# EAGLE board stage_light_paste (EAGLE 6.6.0)
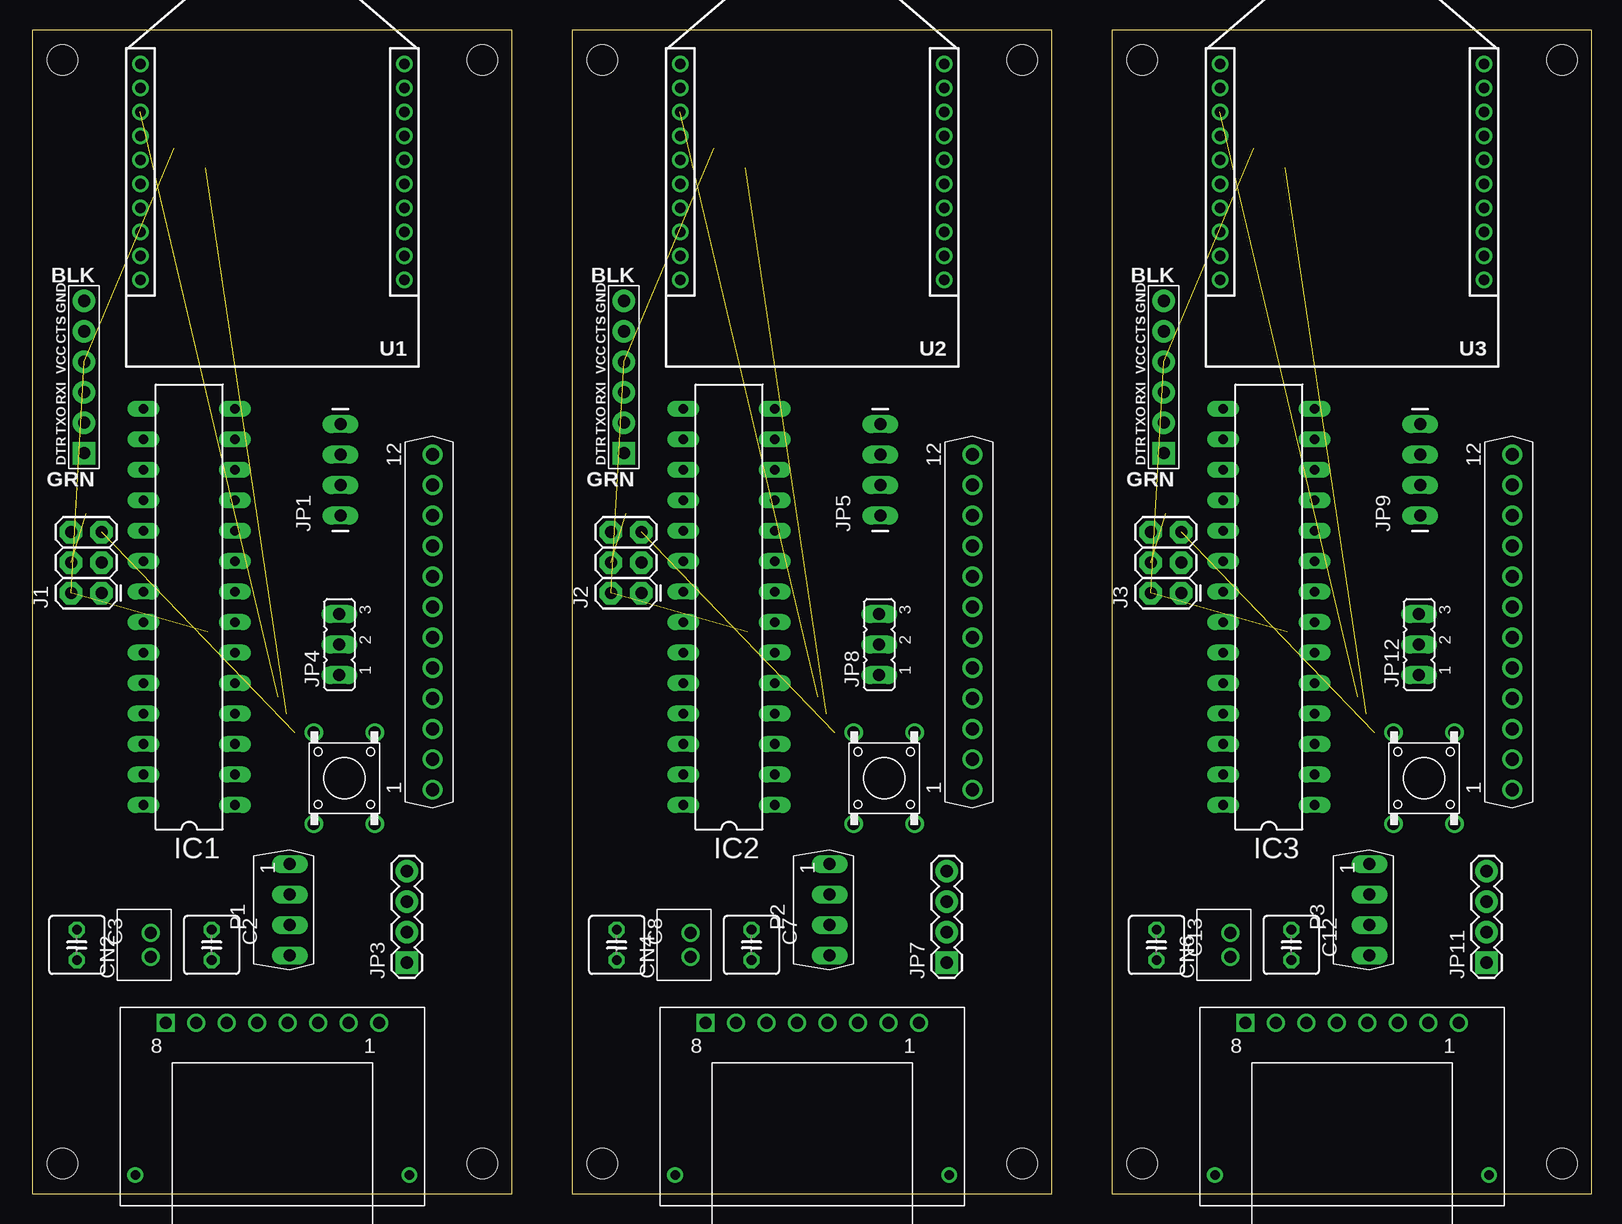
[diagram p0: board, top side]
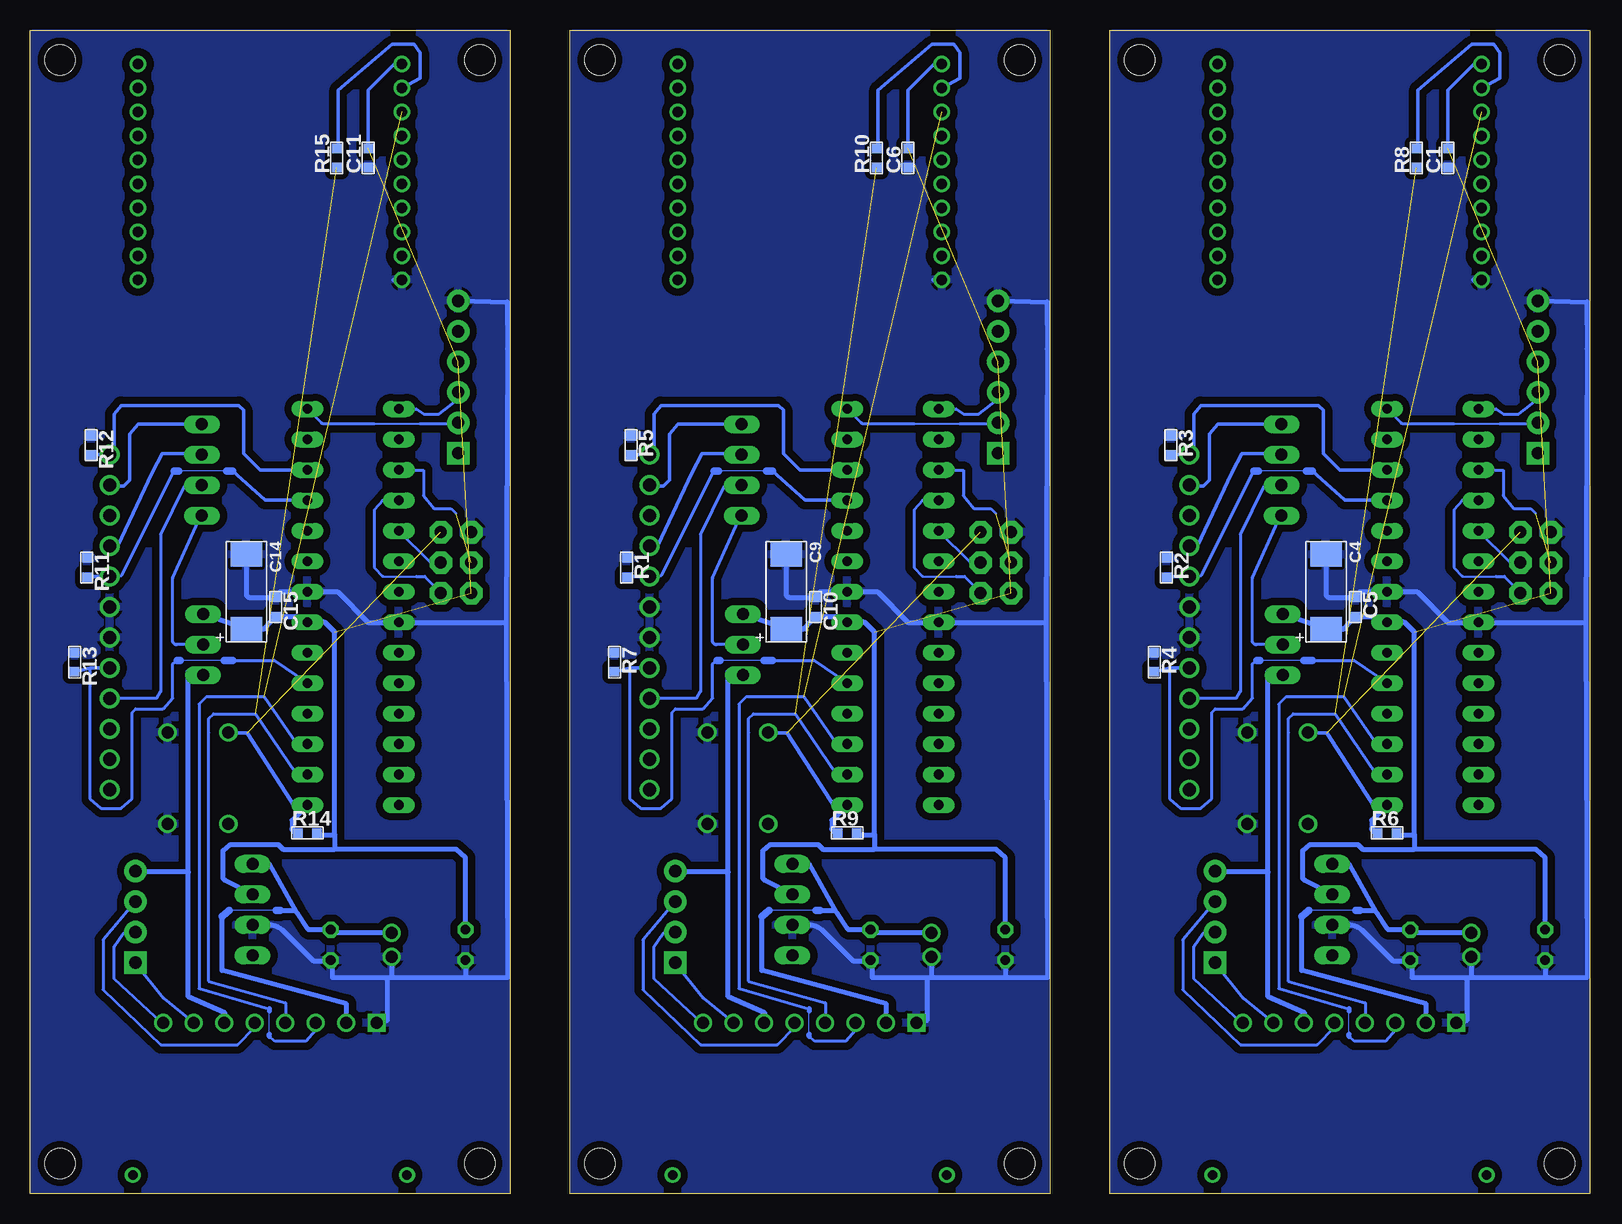
[diagram p1: board, bottom side, seen from below]

Size 130 x 97 mm. Coordinates in mm from the lower left corner, seen from the top.
Outline: 40,0 40,97 0,97 0,0 40,0
Outline: 85,0 85,97 45,97 45,0 85,0
Outline: 130,0 130,97 90,97 90,0 130,0
Copper layers (1*16): Top 0.035mm / dielectric 1.5mm / Bottom 0.035mm
Design rules "default *": minimum track width 10mil, minimum drill 24mil, track to track 8mil, track to pad 8mil, pad to pad 8mil, via to via 8mil, smd to smd 8mil, copper to edge 0mil, drill to drill 8mil, minimum pad ring 10mil, minimum via ring 8mil, stop-mask expansion 4mil, vias tented up to drill 0mil, thermal gap 10mil
Holes 2.5 mm at 37.5,94.5 2.5,94.5 2.5,2.5 37.5,2.5 82.5,94.5 47.5,94.5 47.5,2.5 82.5,2.5 127.5,94.5 92.5,94.5 92.5,2.5 127.5,2.5

## Footprints (pad centres in the part's own frame; a part is rotated, then mirrored left to right if it is on the bottom)
1608(1.6*0.8MM) = smd 0.8 x 0.8: P$1 0.8,0; P$2 -0.8,0
C025-050X050 = drill 0.813 octagon: 1 -1.27,0; 2 1.27,0
6134(6.1*3.4MM)_POLAR = smd 2 x 2.6: + 3.1,0; - -3.1,0
AE-RJ-45-LAN-DIP-A = drill 1 square: 1 -8.89,8.89 | drill 1: 2 -6.35,8.89; 3 -3.81,8.89; 4 -1.27,8.89; 5 1.27,8.89; 6 3.81,8.89; 7 6.35,8.89; 8 8.89,8.89 | drill 0.8: P$11 -11.43,-3.81; P$12 11.43,-3.81
B2B-PH-K-S(2MM_PITCH) = drill 1: 1 1,0; 2 -1,0
DIL28-3 = drill 0.813 long: 1 -16.51,-3.81; 2 -13.97,-3.81; 3 -11.43,-3.81; 4 -8.89,-3.81; 5 -6.35,-3.81; 6 -3.81,-3.81; 7 -1.27,-3.81; 8 1.27,-3.81; 9 3.81,-3.81; 10 6.35,-3.81; 11 8.89,-3.81; 12 11.43,-3.81; 13 13.97,-3.81; 14 16.51,-3.81; 15 16.51,3.81; 16 13.97,3.81; 17 11.43,3.81; 18 8.89,3.81; 19 6.35,3.81; 20 3.81,3.81; 21 1.27,3.81; 22 -1.27,3.81; 23 -3.81,3.81; 24 -6.35,3.81; 25 -8.89,3.81; 26 -11.43,3.81; 27 -13.97,3.81; 28 -16.51,3.81
2X3 = drill 1.016 pad 1.88 octagon: 1 0,0; 2 0,2.54; 3 2.54,0; 4 2.54,2.54; 5 5.08,0; 6 5.08,2.54
1X04_LONGPADS = drill 1 pad 1 long: 1 0,0; 2 2.54,0; 3 5.08,0; 4 7.62,0
FTDI_DEVICE_SIDE = drill 1.016 pad 1.88 square: P$1 -6.35,0 | drill 1.016 pad 1.88: P$2 -3.81,0; P$3 -1.27,0; P$4 1.27,0; P$5 3.81,0; P$6 6.35,0
1X04 = drill 1.016 pad 1.88 square: 1 0,0 | drill 1.016 pad 1.88: 2 2.54,0; 3 5.08,0; 4 7.62,0
JP2 = drill 1 pad 1 long: 1 -2.54,0; 2 0,0; 3 2.54,0
PQ3RD23 = drill 1 pad 1.2 long: 1 -3.81,0; 2 -1.27,0; 3 1.27,0; 4 3.81,0
MP4401 = drill 1.1: 1 -13.97,0; 2 -11.43,0; 3 -8.89,0; 4 -6.35,0; 5 -3.81,0; 6 -1.27,0; 7 1.27,0; 8 3.81,0; 9 6.35,0; 10 8.89,0; 11 11.43,0; 12 13.97,0
1608(1.6*0.8MM)' = smd 0.8 x 0.8: P$3 -0.8,0; P$4 0.8,0
PUSH_SW = drill 1: 1 -3.81,2.54; 2 3.81,2.54; 3 3.81,-2.54; 4 -3.81,-2.54
XBEE_ON_XPPN101BFCN-RC = drill 0.9: 1 -11,18; 2 -11,16; 3 -11,14; 4 -11,12; 5 -11,10; 6 -11,8; 7 -11,6; 8 -11,4; 9 -11,2; 10 -11,0; 11 11,0; 12 11,2; 13 11,4; 14 11,6; 15 11,8; 16 11,10; 17 11,12; 18 11,14; 19 11,16; 20 11,18

## Placement (x,y rotation side)
C1  [1608(1.6*0.8MM)]  11.8,86.33 90 bottom
C2  50u  [C025-050X050]  14.93,20.72 270 top
C3  50u  [C025-050X050]  3.7,20.72 270 top
C4  [6134(6.1*3.4MM)_POLAR]  21.96,50.17 270 bottom
C5  [1608(1.6*0.8MM)]  19.52,48.9 270 bottom
C6  [1608(1.6*0.8MM)]  56.8,86.33 90 bottom
C7  50u  [C025-050X050]  59.93,20.72 270 top
C8  50u  [C025-050X050]  48.7,20.72 270 top
C9  [6134(6.1*3.4MM)_POLAR]  66.96,50.17 270 bottom
C10  [1608(1.6*0.8MM)]  64.52,48.9 270 bottom
C11  [1608(1.6*0.8MM)]  101.8,86.33 90 bottom
C12  50u  [C025-050X050]  104.93,20.72 270 top
C13  50u  [C025-050X050]  93.7,20.72 270 top
C14  [6134(6.1*3.4MM)_POLAR]  111.96,50.17 270 bottom
C15  [1608(1.6*0.8MM)]  109.52,48.9 270 bottom
CN1  RJ45-8DIP  [AE-RJ-45-LAN-DIP-A]  20,5.35 0 top
CN2  2POLE-PH_TOP  [B2B-PH-K-S(2MM_PITCH)]  9.85,20.72 90 top
CN3  RJ45-8DIP  [AE-RJ-45-LAN-DIP-A]  65,5.35 0 top
CN4  2POLE-PH_TOP  [B2B-PH-K-S(2MM_PITCH)]  54.85,20.72 90 top
CN5  RJ45-8DIP  [AE-RJ-45-LAN-DIP-A]  110,5.35 0 top
CN6  2POLE-PH_TOP  [B2B-PH-K-S(2MM_PITCH)]  99.85,20.72 90 top
IC1  MEGA8-P  [DIL28-3]  13.07,48.9 90 top
IC2  MEGA8-P  [DIL28-3]  58.07,48.9 90 top
IC3  MEGA8-P  [DIL28-3]  103.07,48.9 90 top
J1  AVR_SPI_PRG_6PTH  [2X3]  5.76,50.06 90 top
J2  AVR_SPI_PRG_6PTH  [2X3]  50.76,50.06 90 top
J3  AVR_SPI_PRG_6PTH  [2X3]  95.76,50.06 90 top
JP1  [1X04_LONGPADS]  25.67,56.52 90 top
JP2  FTDI_DEVICE  [FTDI_DEVICE_SIDE]  4.31,68.07 90 top
JP3  [1X04]  31.21,19.25 90 top
JP4  [JP2]  25.57,45.76 90 top
JP5  [1X04_LONGPADS]  70.67,56.52 90 top
JP6  FTDI_DEVICE  [FTDI_DEVICE_SIDE]  49.31,68.07 90 top
JP7  [1X04]  76.21,19.25 90 top
JP8  [JP2]  70.57,45.76 90 top
JP9  [1X04_LONGPADS]  115.67,56.52 90 top
JP10  FTDI_DEVICE  [FTDI_DEVICE_SIDE]  94.31,68.07 90 top
JP11  [1X04]  121.21,19.25 90 top
JP12  [JP2]  115.57,45.76 90 top
P1  PQ3RD23  [PQ3RD23]  21.45,23.66 270 top
P2  PQ3RD23  [PQ3RD23]  66.45,23.66 270 top
P3  PQ3RD23  [PQ3RD23]  111.45,23.66 270 top
Q1  MP4401  [MP4401]  33.35,47.63 90 top
Q2  MP4401  [MP4401]  78.35,47.63 90 top
Q3  MP4401  [MP4401]  123.35,47.63 90 top
R1  10k  [1608(1.6*0.8MM)']  80.26,52.19 270 bottom
R2  10k  [1608(1.6*0.8MM)']  35.26,52.19 270 bottom
R3  10k  [1608(1.6*0.8MM)']  34.9,62.39 270 bottom
R4  10k  [1608(1.6*0.8MM)']  36.28,44.29 270 bottom
R5  10k  [1608(1.6*0.8MM)']  79.9,62.39 270 bottom
R6  [1608(1.6*0.8MM)']  16.88,30.05 0 bottom
R7  10k  [1608(1.6*0.8MM)']  81.28,44.29 270 bottom
R8  10k  [1608(1.6*0.8MM)']  14.42,86.34 90 bottom
R9  [1608(1.6*0.8MM)']  61.88,30.05 0 bottom
R10  10k  [1608(1.6*0.8MM)']  59.42,86.34 90 bottom
R11  10k  [1608(1.6*0.8MM)']  125.26,52.19 270 bottom
R12  10k  [1608(1.6*0.8MM)']  124.9,62.39 270 bottom
R13  10k  [1608(1.6*0.8MM)']  126.28,44.29 270 bottom
R14  [1608(1.6*0.8MM)']  106.88,30.05 0 bottom
R15  10k  [1608(1.6*0.8MM)']  104.42,86.34 90 bottom
SW1  PUSH_SWNORMAL  [PUSH_SW]  26,34.63 270 top
SW2  PUSH_SWNORMAL  [PUSH_SW]  71,34.63 270 top
SW3  PUSH_SWNORMAL  [PUSH_SW]  116,34.63 270 top
U1  XBEE_PROXPPN101BFCN  [XBEE_ON_XPPN101BFCN-RC]  20,76.17 0 top
U2  XBEE_PROXPPN101BFCN  [XBEE_ON_XPPN101BFCN-RC]  65,76.17 0 top
U3  XBEE_PROXPPN101BFCN  [XBEE_ON_XPPN101BFCN-RC]  110,76.17 0 top

## Library data of the parts
C1 C4-C6 C9-C11 C14 C15 = Capasitor
C2 C3 C7 C8 C12 C13 = rcl
CN1 CN3 CN5 = Connector-etc
CN2 CN4 CN6 = Connector-Housing
IC1-IC3 = atmel; OC_FARNELL: unknown; OC_NEWARK: unknown
J1-J3 JP1-JP3 JP5-JP7 JP9-JP11 = SparkFun-Connectors
JP4 JP8 JP12 = Jumper
P1-P3 = Voltage Regulator
Q1-Q3 = FET n-ch
R1-R15 = Resistor
SW1-SW3 = Switch
U1-U3 = ZigBee Modules

## Nets
AVCC: IC1.20
AVCC1: IC2.20
AVCC2: IC3.20
GND: C1.P$2 C2.2 C3.2 C4.- C5.P$2 CN1.1 CN2.2 IC1.8 IC1.22 J1.6 JP2.P$6 P1.3 Q1.6 Q1.7 R2.P$3 R3.P$3 R4.P$3 SW1.1 SW1.2 U1.10
GND1: C6.P$2 C7.2 C8.2 C9.- C10.P$2 CN3.1 CN4.2 IC2.8 IC2.22 J2.6 JP6.P$6 P2.3 Q2.6 Q2.7 R1.P$3 R5.P$3 R7.P$3 SW2.1 SW2.2 U2.10
GND2: C11.P$2 C12.2 C13.2 C14.- C15.P$2 CN5.1 CN6.2 IC3.8 IC3.22 J3.6 JP10.P$6 P3.3 Q3.6 Q3.7 R11.P$3 R12.P$3 R13.P$3 SW3.1 SW3.2 U3.10
N$1: JP1.3 Q1.9
N$2: JP1.2 Q1.4
N$3: IC1.12 Q1.12 R3.P$4
N$4: IC1.11 Q1.8 R2.P$4
N$5: IC1.5 Q1.5 R4.P$4
N$6: JP1.4 Q1.11
N$7: IC1.14 JP2.P$2
N$8: IC1.15 JP2.P$3
N$9: CN1.8 JP3.2
N$10: CN1.5 JP3.3
N$11: CN1.7 JP3.1
N$12: IC1.1 J1.5 R6.P$3 SW1.4
N$13: R8.P$4 U1.2
N$14: IC2.12 Q2.12 R5.P$4
N$15: CN1.4 IC1.2 R8.P$3
N$16: CN1.3 IC1.3 U1.3
N$17: IC2.11 Q2.8 R1.P$4
N$18: IC1.18 J1.1
N$19: IC1.19 J1.3
N$20: IC1.17 J1.4
N$21: IC2.5 Q2.5 R7.P$4
N$22: IC2.1 J2.5 R9.P$3 SW2.4
N$23: CN3.4 IC2.2 R10.P$3
N$24: CN3.3 IC2.3 U2.3
N$25: IC2.18 J2.1
N$26: IC2.19 J2.3
N$27: IC2.17 J2.4
N$28: JP5.3 Q2.9
N$29: JP5.2 Q2.4
N$30: JP5.4 Q2.11
N$31: IC2.14 JP6.P$2
N$32: IC2.15 JP6.P$3
N$33: CN3.8 JP7.2
N$34: CN3.5 JP7.3
N$35: CN3.7 JP7.1
N$36: R10.P$4 U2.2
N$37: IC3.12 Q3.12 R12.P$4
N$38: IC3.11 Q3.8 R11.P$4
N$39: IC3.5 Q3.5 R13.P$4
N$40: IC3.1 J3.5 R14.P$3 SW3.4
N$41: CN5.4 IC3.2 R15.P$3
N$42: CN5.3 IC3.3 U3.3
N$43: IC3.18 J3.1
N$44: IC3.19 J3.3
N$45: IC3.17 J3.4
N$46: JP9.3 Q3.9
N$47: JP9.2 Q3.4
N$48: JP9.4 Q3.11
N$49: IC3.14 JP10.P$2
N$50: IC3.15 JP10.P$3
N$51: CN5.8 JP11.2
N$52: CN5.5 JP11.3
N$53: CN5.7 JP11.1
N$54: R15.P$4 U3.2
VCC1: C2.1 CN1.2 CN2.1 P1.1
VCC2: C1.P$1 C3.1 C4.+ C5.P$1 IC1.7 J1.2 JP2.P$4 JP4.3 P1.2 R6.P$4 U1.1
VCC3: JP1.1 JP4.2
VCC4: CN1.6 JP3.4 JP4.1
VCC5: C6.P$1 C8.1 C9.+ C10.P$1 IC2.7 J2.2 JP6.P$4 JP8.3 P2.2 R9.P$4 U2.1
VCC6: C7.1 CN3.2 CN4.1 P2.1
VCC7: JP5.1 JP8.2
VCC8: CN3.6 JP7.4 JP8.1
VCC9: C11.P$1 C13.1 C14.+ C15.P$1 IC3.7 J3.2 JP10.P$4 JP12.3 P3.2 R14.P$4 U3.1
VCC10: C12.1 CN5.2 CN6.1 P3.1
VCC11: JP9.1 JP12.2
VCC12: CN5.6 JP11.4 JP12.1

## Tracks (layer width: path | path; a pad name or v marks a point on that pad's centre or on a via)
GND
  Bottom 0.2: C5.P$2 19.42,49.92 arc90 19.17,50.17 | IC1.22 arc45 9.09,47.7 8.7,47.7
  Bottom 0.406: C3.2 3.7,18 | P1.3 20.09,22.41 arc45 18.92,21.92 16.4,19.4 15.05,19.4 | 15.05,19.4 arc-45 C2.2 | U1.10 9.66,76.17 | 0.3,47.6 0.2,70.4 0.22,74.32 JP2.P$6 | 0.3,47.6 0.2,18 3.7,18 | C4.- 21.96,49.95 arc-90 21.71,49.7 C5.P$2 | 19.17,50.17 IC1.8 14.37,50.17 11.8,47.6 8.8,47.6 8.7,47.7 8.5,47.6 0.3,47.6 | 3.7,18 9.85,18 | 9.85,18 10.2,18 | 10.2,18 14.8,18 14.8,19.15 arc-90 15.05,19.4 | CN2.2 9.85,18 | CN1.1 10.2,14.44 10.2,18
  pour Bottom (isolate 0.6): 0.3,0.3 0.3,96.7 39.7,96.7 39.7,0.3
GND1
  Bottom 0.2: C10.P$2 64.42,49.92 arc90 64.17,50.17 | IC2.22 arc45 54.09,47.7 53.7,47.7
  Bottom 0.406: C8.2 48.7,18 | P2.3 65.09,22.41 arc45 63.92,21.92 61.4,19.4 60.05,19.4 | 60.05,19.4 arc-45 C7.2 | U2.10 54.66,76.17 | 45.3,47.6 45.2,70.4 45.22,74.32 JP6.P$6 | 45.3,47.6 45.2,18 48.7,18 | C9.- 66.96,49.95 arc-90 66.71,49.7 C10.P$2 | 64.17,50.17 IC2.8 59.37,50.17 56.8,47.6 53.8,47.6 53.7,47.7 53.5,47.6 45.3,47.6 | 48.7,18 54.85,18 | 54.85,18 55.2,18 | 55.2,18 59.8,18 59.8,19.15 arc-90 60.05,19.4 | CN4.2 54.85,18 | CN3.1 55.2,14.44 55.2,18
  pour Bottom (isolate 0.6): 45.3,0.3 45.3,96.7 84.7,96.7 84.7,0.3
GND2
  Bottom 0.2: C15.P$2 109.42,49.92 arc90 109.17,50.17 | IC3.22 arc45 99.09,47.7 98.7,47.7
  Bottom 0.406: C13.2 93.7,18 | P3.3 110.09,22.41 arc45 108.92,21.92 106.4,19.4 105.05,19.4 | 105.05,19.4 arc-45 C12.2 | U3.10 99.67,76.17 | 90.3,47.6 90.2,70.4 90.22,74.32 JP10.P$6 | 90.3,47.6 90.2,18 93.7,18 | C14.- 111.96,49.95 arc-90 111.71,49.7 C15.P$2 | 109.17,50.17 IC3.8 104.37,50.17 101.8,47.6 98.8,47.6 98.7,47.7 98.5,47.6 90.3,47.6 | 93.7,18 99.85,18 | 99.85,18 100.2,18 | 100.2,18 104.8,18 104.8,19.15 arc-90 105.05,19.4 | CN6.2 99.85,18 | CN5.1 100.2,14.44 100.2,18
  pour Bottom (isolate 0.6): 90.3,0.3 90.3,96.7 129.7,96.7 129.7,0.3
N$1
  Bottom 0.2: Q1.9 32.7,54 | 25.77,61.7 JP1.3
  Bottom 0.305: 32.7,54 29.8,60.1 29,61.7 25.77,61.7
N$2
  Bottom 0.2: 25.83,59 JP1.2
  Bottom 0.254: Q1.4 29.45,41.28 29.1,41.83 29.1,54.9 27.1,59 25.83,59
N$3
  Bottom 0.254: R3.P$4 35.1,61.6 | Q1.12 33,61.6
  Bottom 0.305: 33,61.6 33,65 32.4,65.7 22.6,65.7 22.2,65.3 22.2,61.7 20.83,60.33 IC1.12 | 35.1,61.6 Q1.12
N$4
  Bottom 0.1: IC1.11 | 23.6,60.25 27.6,60.25
  Bottom 0.254: Q1.8 32.36,51.54 28,60.25 | R2.P$4 34.86,51.44
  Bottom 0.305: 23.1,60.25 20.4,57.8 IC1.11 | 34.86,51.44 Q1.8
  Bottom 0.61: 28,60.25 27.6,60.25 | 23.6,60.25 23.1,60.25
N$5
  Bottom 0.1: 23.8,44.45 27.5,44.45
  Bottom 0.254: 27.75,44.45 28.1,44.15 28.1,41.3 28.9,40.4 31.2,40.4 31.5,40.1 31.5,32.9 32.4,32.1 34.05,32.1 35,32.9 35,43.81 | 23.1,44.45 19.63,44.45 IC1.5 | Q1.5 33.05,43.81
  Bottom 0.305: 33.05,43.81 35,43.81 R4.P$4
  Bottom 0.61: 27.75,44.45 27.5,44.45 | 23.8,44.45 23.1,44.45
N$6
  Bottom 0.2: 32.99,59 Q1.11
  Bottom 0.305: JP1.4 30.96,64.14 31.7,63.3 31.7,59.5 32.2,59 32.99,59
N$7
  Bottom 0.1: 4.87,64.15 JP2.P$2
  Bottom 0.15: 7.5,64.15 11.3,64.15
  Bottom 0.254: 4.87,64.15 7.5,64.15 | 11.3,64.15 15.46,64.15 arc45 15.74,64.27 IC1.14
N$8
  Bottom 0.127: 4.5,66.11 JP2.P$3
  Bottom 0.254: IC1.15 7.81,65.41 7.2,65 5.9,65 5,65.7 4.5,66.11
N$9
  Bottom 0.254: CN1.8 28.98,14.18 33,17.9 33,20.6 32.21,21.69 JP3.2
N$10
  Bottom 0.254: JP3.3 33.9,21.14 33.9,17 29.1,12.4 22.7,12.4 21.26,13.84 CN1.5
N$11
  Bottom 0.254: JP3.1 28.84,16.28 CN1.7
N$12  (1 unrouted)
  Bottom 0.2: 16.88,32.2 IC1.1
  Bottom 0.254: 17.9,32.2 16.88,32.2
  Bottom 0.305: SW1.4 23.4,38.4 21.9,38.4 17.9,32.2
  Bottom 0.406: IC1.1 18.15,31.12 18.15,30.43 arc-45 18.08,30.25 R6.P$3
N$13
  Bottom 0.3: R8.P$4 14.3,87.14 14.3,92 9.8,95.8 8,95.8 7.5,95.1 7.5,93 8.93,92.17 U1.2
N$14
  Bottom 0.254: R5.P$4 80.1,61.6 | Q2.12 78,61.6
  Bottom 0.305: 78,61.6 78,65 77.4,65.7 67.6,65.7 67.2,65.3 67.2,61.7 65.83,60.33 IC2.12 | 80.1,61.6 Q2.12
N$15  (1 unrouted)
  Bottom 0.2: 17.8,35 arc-45 17.62,34.93 IC1.2 | 18.7,14.93 CN1.4
  Bottom 0.254: 17.8,35 21.2,40 24.7,40 25.09,39.6 25.1,38.4 25.1,17.7 18.7,15.9 18.7,14.93
N$16  (1 unrouted)
  Bottom 0.1: 20.05,13.3 20.05,15.2
  Bottom 0.2: IC1.3 17.77,37.47
  Bottom 0.254: 17.77,37.47 20.5,41.4 25.3,41.4 25.9,40.8 25.9,17.1 20.05,15.4 | CN1.3 16.18,13.62 17,12.7 19.59,12.7 20.05,13.1
  Bottom 0.406: 20.05,15.4 20.05,15.2 | 20.05,13.1 20.05,13.3
N$17
  Bottom 0.1: IC2.11 | 68.6,60.25 72.6,60.25
  Bottom 0.254: Q2.8 77.36,51.54 73,60.25 | R1.P$4 79.86,51.44
  Bottom 0.305: 68.1,60.25 65.4,57.8 IC2.11 | 79.86,51.44 Q2.8
  Bottom 0.61: 73,60.25 72.6,60.25 | 68.6,60.25 68.1,60.25
N$18
  Bottom 0.15: 10.6,51.45 7.8,51.45
  Bottom 0.254: IC1.18 10.61,57.79 11.3,57 11.3,52.2 10.6,51.45 | 7.8,51.45 7.1,51.45 J1.1
N$19
  Bottom 0.1: 6.61,52.6 J1.3
  Bottom 0.254: 6.61,52.6 IC1.19
N$20  (1 unrouted)
  Bottom 0.254: IC1.17 9.26,60.3 7.2,60.3 7.2,58.2 6.3,57.1 4.9,57.1 4.5,56.7
N$21
  Bottom 0.1: 68.8,44.45 72.5,44.45
  Bottom 0.254: 72.75,44.45 73.1,44.15 73.1,41.3 73.9,40.4 76.2,40.4 76.5,40.1 76.5,32.9 77.4,32.1 79.05,32.1 80,32.9 80,43.81 | 68.1,44.45 64.63,44.45 IC2.5 | Q2.5 78.05,43.81
  Bottom 0.305: 78.05,43.81 80,43.81 R7.P$4
  Bottom 0.61: 72.75,44.45 72.5,44.45 | 68.8,44.45 68.1,44.45
N$22  (1 unrouted)
  Bottom 0.2: 61.88,32.2 IC2.1
  Bottom 0.254: 62.9,32.2 61.88,32.2
  Bottom 0.305: SW2.4 68.4,38.4 66.9,38.4 62.9,32.2
  Bottom 0.406: IC2.1 63.15,31.12 63.15,30.43 arc-45 63.08,30.25 R9.P$3
N$23  (1 unrouted)
  Bottom 0.2: 62.8,35 arc-45 62.62,34.93 IC2.2 | 63.7,14.93 CN3.4
  Bottom 0.254: 62.8,35 66.2,40 69.69,40 70.09,39.6 70.1,38.4 70.1,17.7 63.7,15.9 63.7,14.93
N$24  (1 unrouted)
  Bottom 0.1: 65.05,13.3 65.05,15.2
  Bottom 0.2: IC2.3 62.77,37.47
  Bottom 0.254: 62.77,37.47 65.5,41.4 70.3,41.4 70.9,40.8 70.9,17.1 65.05,15.4 | CN3.3 61.18,13.62 62,12.7 64.59,12.7 65.05,13.1
  Bottom 0.406: 65.05,15.4 65.05,15.2 | 65.05,13.1 65.05,13.3
N$25
  Bottom 0.15: 55.6,51.45 52.8,51.45
  Bottom 0.254: IC2.18 55.61,57.79 56.3,57 56.3,52.2 55.6,51.45 | 52.8,51.45 52.1,51.45 J2.1
N$26
  Bottom 0.1: 51.61,52.6 J2.3
  Bottom 0.254: 51.61,52.6 IC2.19
N$27  (1 unrouted)
  Bottom 0.254: IC2.17 54.26,60.3 52.2,60.3 52.2,58.2 51.3,57.1 49.9,57.1 49.5,56.7
N$28
  Bottom 0.2: Q2.9 77.7,54 | 70.77,61.7 JP5.3
  Bottom 0.305: 77.7,54 74.8,60.1 74,61.7 70.77,61.7
N$29
  Bottom 0.2: 70.83,59 JP5.2
  Bottom 0.254: Q2.4 74.45,41.28 74.1,41.83 74.1,54.9 72.1,59 70.83,59
N$30
  Bottom 0.2: 77.99,59 Q2.11
  Bottom 0.305: JP5.4 75.96,64.14 76.7,63.3 76.7,59.5 77.2,59 77.99,59
N$31
  Bottom 0.1: 49.87,64.15 JP6.P$2
  Bottom 0.15: 52.5,64.15 56.3,64.15
  Bottom 0.254: 49.87,64.15 52.5,64.15 | 56.3,64.15 60.47,64.15 arc45 60.74,64.27 IC2.14
N$32
  Bottom 0.127: 49.5,66.11 JP6.P$3
  Bottom 0.254: IC2.15 52.81,65.41 52.2,65 50.9,65 50,65.7 49.5,66.11
N$33
  Bottom 0.254: CN3.8 73.98,14.18 78,17.9 78,20.6 77.21,21.69 JP7.2
N$34
  Bottom 0.254: JP7.3 78.9,21.14 78.9,17 74.1,12.4 67.7,12.4 66.26,13.84 CN3.5
N$35
  Bottom 0.254: JP7.1 73.84,16.28 CN3.7
N$36
  Bottom 0.3: R10.P$4 59.3,87.14 59.3,92 54.8,95.8 53,95.8 52.5,95.1 52.5,93 53.93,92.17 U2.2
N$37
  Bottom 0.254: R12.P$4 125.1,61.6 | Q3.12 123,61.6
  Bottom 0.305: 123,61.6 123,65 122.4,65.7 112.6,65.7 112.2,65.3 112.2,61.7 110.83,60.33 IC3.12 | 125.1,61.6 Q3.12
N$38
  Bottom 0.1: IC3.11 | 113.6,60.25 117.6,60.25
  Bottom 0.254: Q3.8 122.36,51.54 118,60.25 | R11.P$4 124.86,51.44
  Bottom 0.305: 113.1,60.25 110.4,57.8 IC3.11 | 124.86,51.44 Q3.8
  Bottom 0.61: 118,60.25 117.6,60.25 | 113.6,60.25 113.1,60.25
N$39
  Bottom 0.1: 113.8,44.45 117.5,44.45
  Bottom 0.254: 117.75,44.45 118.1,44.15 118.1,41.3 118.9,40.4 121.2,40.4 121.5,40.1 121.5,32.9 122.4,32.1 124.05,32.1 125,32.9 125,43.81 | 113.1,44.45 109.63,44.45 IC3.5 | Q3.5 123.05,43.81
  Bottom 0.305: 123.05,43.81 125,43.81 R13.P$4
  Bottom 0.61: 117.75,44.45 117.5,44.45 | 113.8,44.45 113.1,44.45
N$40  (1 unrouted)
  Bottom 0.2: 106.88,32.2 IC3.1
  Bottom 0.254: 107.9,32.2 106.88,32.2
  Bottom 0.305: SW3.4 113.4,38.4 111.9,38.4 107.9,32.2
  Bottom 0.406: IC3.1 108.15,31.12 108.15,30.43 arc-45 108.08,30.25 R14.P$3
N$41  (1 unrouted)
  Bottom 0.2: 107.8,35 arc-45 107.62,34.93 IC3.2 | 108.7,14.93 CN5.4
  Bottom 0.254: 107.8,35 111.2,40 114.69,40 115.09,39.6 115.1,38.4 115.1,17.7 108.7,15.9 108.7,14.93
N$42  (1 unrouted)
  Bottom 0.1: 110.05,13.3 110.05,15.2
  Bottom 0.2: IC3.3 107.77,37.47
  Bottom 0.254: 107.77,37.47 110.5,41.4 115.3,41.4 115.9,40.8 115.9,17.1 110.05,15.4 | CN5.3 106.18,13.62 107,12.7 109.59,12.7 110.05,13.1
  Bottom 0.406: 110.05,15.4 110.05,15.2 | 110.05,13.1 110.05,13.3
N$43
  Bottom 0.15: 100.6,51.45 97.8,51.45
  Bottom 0.254: IC3.18 100.61,57.79 101.3,57 101.3,52.2 100.6,51.45 | 97.8,51.45 97.1,51.45 J3.1
N$44
  Bottom 0.1: 96.61,52.6 J3.3
  Bottom 0.254: 96.61,52.6 IC3.19
N$45  (1 unrouted)
  Bottom 0.254: IC3.17 99.26,60.3 97.2,60.3 97.2,58.2 96.3,57.1 94.9,57.1 94.5,56.7
N$46
  Bottom 0.2: Q3.9 122.7,54 | 115.77,61.7 JP9.3
  Bottom 0.305: 122.7,54 119.8,60.1 119,61.7 115.77,61.7
N$47
  Bottom 0.2: 115.83,59 JP9.2
  Bottom 0.254: Q3.4 119.45,41.28 119.1,41.83 119.1,54.9 117.1,59 115.83,59
N$48
  Bottom 0.2: 122.99,59 Q3.11
  Bottom 0.305: JP9.4 120.96,64.14 121.7,63.3 121.7,59.5 122.2,59 122.99,59
N$49
  Bottom 0.1: 94.87,64.15 JP10.P$2
  Bottom 0.15: 97.5,64.15 101.3,64.15
  Bottom 0.254: 94.87,64.15 97.5,64.15 | 101.3,64.15 105.47,64.15 arc45 105.74,64.27 IC3.14
N$50
  Bottom 0.127: 94.5,66.11 JP10.P$3
  Bottom 0.254: IC3.15 97.81,65.41 97.2,65 95.9,65 95,65.7 94.5,66.11
N$51
  Bottom 0.254: CN5.8 118.98,14.18 123,17.9 123,20.6 122.21,21.69 JP11.2
N$52
  Bottom 0.254: JP11.3 123.9,21.14 123.9,17 119.1,12.4 112.7,12.4 111.26,13.84 CN5.5
N$53
  Bottom 0.254: JP11.1 118.84,16.28 CN5.7
N$54
  Bottom 0.3: R15.P$4 104.3,87.14 104.3,92 99.8,95.8 98,95.8 97.5,95.1 97.5,93 98.93,92.17 U3.2
VCC1
  Bottom 0.1: 18.04,23.6 17.73,23.39 | 19.5,23.6 23.4,23.6
  Bottom 0.406: CN2.1 14.55,21.72 arc45 14.73,21.79 C2.1 16.66,21.99 arc45 16.84,22.06 17.73,23.39 20.04,27.46 P1.1 | CN1.2 13.61,15.81 24,18.6 24,23.1 | 19.15,23.6 18.04,23.6
  Bottom 0.61: 24,23.1 23.4,23.6 | 19.5,23.6 19.15,23.6
VCC2  (3 unrouted)
  Bottom 0.2: R6.P$4 14.6,29.85
  Bottom 0.3: U1.1 9.69,94.11 11.8,92 C1.P$1
  Bottom 0.406: P1.2 23.73,26.11 arc45 23.9,26.29 23.9,28.59 23.3,29.1 19.3,29.1 18.9,28.7 14.6,28.7 | R6.P$4 arc45 15.96,29.9 14.6,29.9 14.6,46.8 15.36,47.56 arc-45 15.54,47.63 IC1.7 17.28,48.03 arc-45 17.45,48.1 C5.P$1 20.38,47.14 arc45 20.55,47.07 C4.+ JP4.3 | 14.6,28.7 4.5,28.7 3.7,28 C3.1 | 14.6,29.85 14.6,28.7
VCC3
  Bottom 0.2: 25.79,56.5 arc-90 JP1.1
  Bottom 0.254: JP4.2 27.75,45.76 arc90 28.1,46.01 28.1,51.3 25.79,56.5
VCC4
  Bottom 0.406: CN1.6 23.76,15.06 26.8,16.4 26.8,26.8 | 26.8,26.8 26.8,43.55 JP4.1 | JP3.4 26.87,26.87 26.8,26.8
VCC5  (3 unrouted)
  Bottom 0.2: R9.P$4 59.6,29.85
  Bottom 0.3: U2.1 54.69,94.11 56.8,92 C6.P$1
  Bottom 0.406: P2.2 68.73,26.11 arc45 68.9,26.29 68.9,28.59 68.3,29.1 64.3,29.1 63.9,28.7 59.6,28.7 | R9.P$4 arc45 60.96,29.9 59.6,29.9 59.6,46.8 60.36,47.56 arc-45 60.53,47.63 IC2.7 62.28,48.03 arc-45 62.45,48.1 C10.P$1 65.38,47.14 arc45 65.56,47.07 C9.+ JP8.3 | 59.6,28.7 49.5,28.7 48.7,28 C8.1 | 59.6,29.85 59.6,28.7
VCC6
  Bottom 0.1: 63.04,23.6 62.73,23.39 | 64.5,23.6 68.4,23.6
  Bottom 0.406: CN4.1 59.55,21.72 arc45 59.73,21.79 C7.1 61.66,21.99 arc45 61.84,22.06 62.73,23.39 65.04,27.46 P2.1 | CN3.2 58.61,15.81 69,18.6 69,23.1 | 64.15,23.6 63.04,23.6
  Bottom 0.61: 69,23.1 68.4,23.6 | 64.5,23.6 64.15,23.6
VCC7
  Bottom 0.2: 70.79,56.5 arc-90 JP5.1
  Bottom 0.254: JP8.2 72.75,45.76 arc90 73.1,46.01 73.1,51.3 70.79,56.5
VCC8
  Bottom 0.406: CN3.6 68.76,15.06 71.8,16.4 71.8,26.8 | 71.8,26.8 71.8,43.55 JP8.1 | JP7.4 71.87,26.87 71.8,26.8
VCC9  (3 unrouted)
  Bottom 0.2: R14.P$4 104.6,29.85
  Bottom 0.3: U3.1 99.69,94.11 101.8,92 C11.P$1
  Bottom 0.406: P3.2 113.73,26.11 arc45 113.9,26.29 113.9,28.59 113.3,29.1 109.3,29.1 108.9,28.7 104.6,28.7 | R14.P$4 arc45 105.96,29.9 104.6,29.9 104.6,46.8 105.36,47.56 arc-45 105.53,47.63 IC3.7 107.28,48.03 arc-45 107.45,48.1 C15.P$1 110.38,47.14 arc45 110.56,47.07 C14.+ JP12.3 | 104.6,28.7 94.5,28.7 93.7,28 C13.1 | 104.6,29.85 104.6,28.7
VCC10
  Bottom 0.1: 108.04,23.6 107.73,23.39 | 109.5,23.6 113.4,23.6
  Bottom 0.406: CN6.1 104.56,21.72 arc45 104.73,21.79 C12.1 106.67,21.99 arc45 106.84,22.06 107.73,23.39 110.04,27.46 P3.1 | CN5.2 103.61,15.81 114,18.6 114,23.1 | 109.15,23.6 108.04,23.6
  Bottom 0.61: 114,23.1 113.4,23.6 | 109.5,23.6 109.15,23.6
VCC11
  Bottom 0.2: 115.79,56.5 arc-90 JP9.1
  Bottom 0.254: JP12.2 117.75,45.76 arc90 118.1,46.01 118.1,51.3 115.79,56.5
VCC12
  Bottom 0.406: CN5.6 113.76,15.06 116.8,16.4 116.8,26.8 | 116.8,26.8 116.8,43.55 JP12.1 | JP11.4 116.87,26.87 116.8,26.8